# Allegro board isolated_v-i_dac.brd
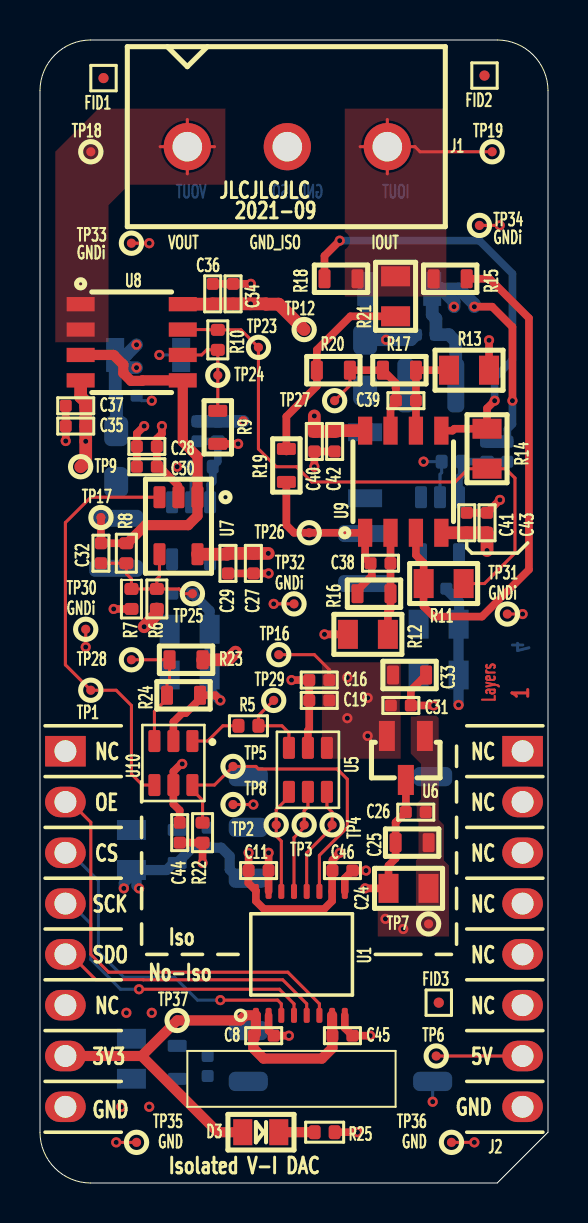
[diagram p0: board, top side]
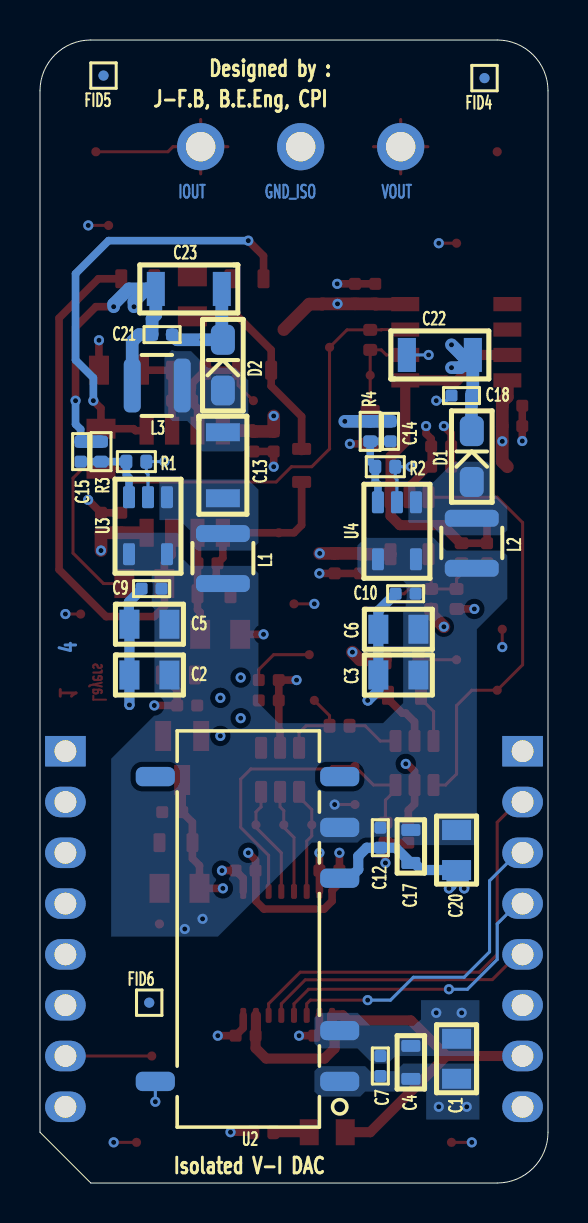
[diagram p1: board, bottom side, seen from below]

Outline 25.4 x 57.15 mm; copper layers: TOP, INNER1, INNER2, BOTTOM. Coordinates in mm from the lower left corner of the outline.
Outline path: 0,54.61 0,2.54 arc(0.74,0.74) 2.54,0 22.86,0 25.4,2.54 25.4,54.61 arc(24.66,56.41) 22.86,57.15 2.54,57.15 arc(0.74,56.41) 0,54.61

## Design rules (mm)
constraint set DEFAULT: min track width 0.152

## Placement (name value [footprint] x y rotation side)
C1  10uF  [0805_CAP]  4.57 7.11 270 bottom
C2  22uF  [0805_CAP]  20.83 25.4 180 bottom
C3  22uF  [0805_CAP]  8.38 25.4 180 bottom
C4  1uF  [0603_CAP_IPC]  6.86 6.86 270 bottom
C5  22uF  [0805_CAP]  20.83 27.94 180 bottom
C6  22uF  [0805_CAP]  8.38 27.69 180 bottom
C7  0.1uF  [0402_CAP_IPC]  8.38 6.35 270 bottom
C8  0.1uF  [0402_CAP_IPC]  11.68 7.37 180 top
C9  0.1uF  [0402_CAP_IPC]  20.32 29.72 180 bottom
C10  0.1uF  [0402_CAP_IPC]  7.62 29.46 180 bottom
C11  0.1uF  [0402_CAP_IPC]  11.43 15.62 180 top
C12  0.1uF  [0402_CAP_IPC]  8.38 16.76 90 bottom
C13  1uF  [1206_CAP]  16.26 37.34 270 bottom
C14  100pF  [0402_CAP_IPC]  7.87 37.08 90 bottom
C15  560pF  [0402_CAP_IPC]  23.37 36.07 90 bottom
C16  0.1uF  [0402_CAP_IPC]  13.46 25.15 0 top
C17  1uF  [0603_CAP_IPC]  6.86 16 90 bottom
C18  0.1uF  [0402_CAP_IPC]  4.83 39.37 180 bottom
C19  10nF  [0402_CAP_IPC]  13.46 24.13 0 top
C20  10uF  [0805_CAP]  4.57 15.75 90 bottom
C21  0.1uF  [0402_CAP_IPC]  18.8 42.42 0 bottom
C22  10uF  [1206_CAP]  6.86 41.4 180 bottom
C23  10uF  [1206_CAP]  16.51 44.7 0 bottom
C24  10uF  [0805_CAP]  17.53 14.73 0 top
C25  1uF  [0603_CAP_IPC]  17.78 17.02 0 top
C26  0.1uF  [0402_CAP_IPC]  18.29 18.54 0 top
C27  0.1uF  [0402_CAP_IPC]  10.67 30.48 90 top
C28  0.1uF  [0402_CAP_IPC]  5.84 36.83 180 top
C29  10nF  [0402_CAP_IPC]  9.4 30.48 90 top
C30  10nF  [0402_CAP_IPC]  5.84 35.81 180 top
C31  0.1uF  [0402_CAP_IPC]  18.54 23.88 180 top
C32  22pF  [0402_CAP_IPC]  3.05 30.99 90 top
C33  1uF  [0603_CAP_IPC]  19.3 25.4 180 top
C34  0.1uF  [0402_CAP_IPC]  9.65 44.96 270 top
C35  0.1uF  [0402_CAP_IPC]  2.29 37.85 180 top
C36  10nF  [0402_CAP_IPC]  8.64 44.96 270 top
C37  10nF  [0402_CAP_IPC]  2.29 38.86 180 top
C38  100pF  [0402_CAP_IPC]  17.53 30.99 180 top
C39  100pF  [0402_CAP_IPC]  18.8 39.12 180 top
C40  0.1uF  [0402_CAP_IPC]  13.72 36.58 90 top
C41  0.1uF  [0402_CAP_IPC]  22.35 32.51 90 top
C42  10nF  [0402_CAP_IPC]  14.73 36.58 90 top
C43  10nF  [0402_CAP_IPC]  21.34 32.51 90 top
C44  0.1uF  [0402_CAP_IPC]  6.99 17.02 90 top
C45  0.1uF  [0402_CAP_IPC]  15.62 7.37 180 top
C46  0.1uF  [0402_CAP_IPC]  15.62 15.62 180 top
D1  SD103AWS-TP  [SOD323]  3.81 35.05 90 bottom
D2  SD103AWS-TP  [SOD323]  16.26 39.62 90 bottom
D3  LED GREEN  [0603_LED]  11.94 2.54 180 top
FID1  Fiducial  [FIDUCIAL_CIR20MIL]  3.17 55.24 0 top
FID2  Fiducial  [FIDUCIAL_CIR20MIL]  22.23 55.37 0 top
FID3  Fiducial  [FIDUCIAL_CIR20MIL]  19.94 9.02 0 top
FID4  Fiducial  [FIDUCIAL_CIR20MIL]  3.17 55.24 180 bottom
FID5  Fiducial  [FIDUCIAL_CIR20MIL]  22.23 55.37 180 bottom
FID6  Fiducial  [FIDUCIAL_CIR20MIL]  19.94 9.02 180 bottom
J1  HEADER 3  [PHOENIX3]  7.37 51.82 0 top
J2  ClickBoard  [MIKROBUS-CLICKBOARD]  -1.27 1.27 0 top
L1  10uH  [IND_1008]  16.26 29.97 90 bottom
L2  10uH  [IND_1008]  3.81 30.73 90 bottom
L3  10uH  [IND_1008]  18.29 39.88 0 bottom
NOREF  -  []  18.54 4.32 0 top
NOREF#2  -  []  18.54 2.79 0 top
R1  1K96  [0402_RES_IPC]  21.08 36.07 180 bottom
R2  13K30  [0402_RES_IPC]  8.64 35.81 180 bottom
R3  29K4  [0402_RES_IPC]  22.35 36.07 90 bottom
R4  200K  [0402_RES_IPC]  8.89 37.08 90 bottom
R5  2K74  [0402_RES_IPC]  10.92 22.86 180 top
R6  5K90  [0402_RES_IPC]  5.84 28.7 90 top
R7  8K450  [0402_RES_IPC]  4.57 28.7 90 top
R8  16K20  [0402_RES_IPC]  4.32 30.99 90 top
R9  10K0  [0603_RES_IPC]  8.89 38.61 270 top
R10  5K90  [0402_RES_IPC]  8.89 41.66 90 top
R11  453K  [0805_RES_IPC]  21.08 29.97 180 top
R12  453K  [0805_RES_IPC]  15.49 27.43 0 top
R13  453K  [0805_RES_IPC]  22.35 40.64 180 top
R14  453K  [0805_RES_IPC]  22.35 35.81 90 top
R15  10K0  [0603_RES_IPC]  21.34 45.21 180 top
R16  10K0  [0603_RES_IPC]  17.53 29.46 180 top
R17  10K0  [0603_RES_IPC]  18.8 40.64 180 top
R18  10K0  [0603_RES_IPC]  14.22 45.21 0 top
R19  15R0  [0603_RES_IPC]  12.32 36.7 270 top
R20  15R0  [0603_RES_IPC]  15.49 40.64 180 top
R21  10R0  [0805_RES_IPC]  17.78 43.43 90 top
R22  10K0  [0402_RES_IPC]  8.13 17.02 90 top
R23  10K0  [0603_RES_IPC]  8.13 26.16 180 top
R24  10K0  [0603_RES_IPC]  6.35 24.38 0 top
R25  1K96  [0402_RES_IPC]  14.73 2.54 180 top
TP1  test_pad  [TEST_PAD_CIR_18MIL]  2.54 24.64 0 top
TP2  test_pad  [TEST_PAD_CIR_18MIL]  11.81 17.91 0 top
TP3  test_pad  [TEST_PAD_CIR_18MIL]  13.21 17.91 0 top
TP4  test_pad  [TEST_PAD_CIR_18MIL]  14.61 17.91 0 top
TP5  test_pad  [TEST_PAD_CIR_18MIL]  9.65 20.83 0 top
TP6  test_pad  [TEST_PAD_CIR_18MIL]  19.81 6.35 0 top
TP7  test_pad  [TEST_PAD_CIR_18MIL]  19.43 12.95 0 top
TP8  test_pad  [TEST_PAD_CIR_18MIL]  9.65 18.92 0 top
TP9  test_pad  [TEST_PAD_CIR_18MIL]  2.03 35.81 0 top
TP12  test_pad  [TEST_PAD_CIR_18MIL]  13.21 42.67 0 top
TP16  test_pad  [TEST_PAD_CIR_18MIL]  11.94 26.42 0 top
TP17  test_pad  [TEST_PAD_CIR_18MIL]  3.05 33.27 0 top
TP18  test_pad  [TEST_PAD_CIR_18MIL]  2.54 51.56 0 top
TP19  test_pad  [TEST_PAD_CIR_18MIL]  22.61 51.56 0 top
TP23  test_pad  [TEST_PAD_CIR_18MIL]  10.92 41.78 0 top
TP24  test_pad  [TEST_PAD_CIR_18MIL]  8.89 40.39 0 top
TP25  test_pad  [TEST_PAD_CIR_18MIL]  7.62 29.46 0 top
TP26  test_pad  [TEST_PAD_CIR_18MIL]  13.46 32.51 0 top
TP27  test_pad  [TEST_PAD_CIR_18MIL]  14.73 39.12 0 top
TP28  test_pad  [TEST_PAD_CIR_18MIL]  4.57 26.16 0 top
TP29  test_pad  [TEST_PAD_CIR_18MIL]  11.68 24.13 0 top
TP30  test_pad  [TEST_PAD_CIR_18MIL]  2.29 27.69 0 top
TP31  test_pad  [TEST_PAD_CIR_18MIL]  23.37 28.45 0 top
TP32  test_pad  [TEST_PAD_CIR_18MIL]  12.7 28.96 0 top
TP33  test_pad  [TEST_PAD_CIR_18MIL]  4.57 46.99 0 top
TP34  test_pad  [TEST_PAD_CIR_18MIL]  21.97 47.88 0 top
TP35  test_pad  [TEST_PAD_CIR_18MIL]  4.83 2.03 0 top
TP36  test_pad  [TEST_PAD_CIR_18MIL]  20.57 2.03 0 top
TP37  test_pad  [TEST_PAD_CIR_18MIL]  6.86 8.13 0 top
U1  ADUM7440ARQZ  [QSOP-16]  10.79 8.38 0 top
U2  DCPA10505P-U/700  [DCPA10505P]  10.41 5.08 90 bottom
U3  LM2611BMF  [SOT23-5]  19.05 34.29 0 bottom
U4  LMR64010XMFE/NOPB  [SOT23-5]  6.6 34.04 0 bottom
U5  DAC8311IDCKR  [SOT23-6]  12.45 19.56 0 top
U6  REF3040AIDBZT  [SOT23-3]  19.3 22.35 270 top
U7  TLV9301IDCKR  [SOT23-5]  7.87 34.29 180 top
U8  TLV9302IDR  [SOIC-8]  2.03 43.94 0 top
U9  TLV9302IDR  [SOIC-8]  16.26 32.51 90 top
U10  74LVC1G3157  [SOT23-6]  7.62 22.1 180 top

## Library data of the parts
C1-C46 = CAP-NP
D1 D2 = Diode Schottky
D3 = LED
FID1-FID6 = Fiducial
J1 = HEADER 3
J2 = ClickBoard-add-on_0
L1-L3 = Inductor
R1-R25 = Resistor
TP1-TP9 TP12 TP16-TP19 TP23-TP37 = test_pad
U1 = ADuM7440ARQZ
U2 = DCPA10505P
U3 = LM2611BMF
U4 = LMR64010XMFE
U5 = DAC8311
U6 = REF3040AIDBZT
U7 = TLV9301IDCKR
U8 U9 = TLV9302IDR
U10 = 74LVC1G3157

## Footprints (pads in the part's own frame, mm; a bottom-side part is the same pattern mirrored in y, then rotated)
0402_CAP_IPC
  rrect 0.6x0.6 smd: 1(0,0) 2(1,0)
0402_RES_IPC
  rrect 0.6x0.7 smd: 1(0,0) 2(1,0)
0603_CAP_IPC
  rrect 0.6x0.95 smd: 1(0,0) 2(1.651,0)
0603_LED
  rect 0.95x1.3 smd: 1(0,0) 2(1.8,0)
0603_RES_IPC
  rrect 0.6x0.95 smd: 1(0,0) 2(1.651,0)
0805_CAP
  rect 1x1.45 smd: 1(-0.1,0) 2(1.9,0)
0805_RES_IPC
  rect 1x1.45 smd: 1(-0.1,0) 2(1.9,0)
1206_CAP
  rect 0.9x1.7 smd: 1(-0.2,0) 2(3.1,0)
DCPA10505P
  rrect 0.965x1.956 smd: 1(0,0) 2(2.54,0) 3(10.16,0) 4(12.7,0) 5(15.24,0) 6(15.24,9.22) 7(0,9.22)
FIDUCIAL_CIR20MIL
  round 0.508 smd: 1(0,0)
IND_1008
  rrect 0.85x2.7 smd: 1(0,0) 2(2.5,0)
MIKROBUS-CLICKBOARD
  rect 2.032x1.524 hole 1.092: 1(2.54,20.32) 16(25.4,20.32)
  oval 2.032x1.524 hole 1.092: 2(2.54,17.78) 3(2.54,15.24) 4(2.54,12.7) 5(2.54,10.16) 6(2.54,7.62) 7(2.54,5.08) 8(2.54,2.54) 9(25.4,2.54) 10(25.4,5.08) 11(25.4,7.62) 12(25.4,10.16) 13(25.4,12.7) 14(25.4,15.24) 15(25.4,17.78)
PHOENIX3
  round 2.362 hole 1.473: 1(0,0) 2(5,0) 3(10,0)
QSOP-16
  rrect 0.3x0.75 smd: 1(0,0) 2(0.635,0) 3(1.27,0) 4(1.905,0) 5(2.54,0) 6(3.175,0) 7(3.81,0) 8(4.445,0) 9(4.445,6.198) 10(3.81,6.198) 11(3.175,6.198) 12(2.54,6.198) 13(1.905,6.198) 14(1.27,6.198) 15(0.635,6.198) 16(0,6.198)
SOD323
  rrect 1.5x1.2 smd: 1(0,0) 2(2.54,0)
SOIC-8
  rect 1.397x0.711 smd: 1(0,0) 2(0,-1.27) 3(0,-2.54) 4(0,-3.81) 5(5.105,-3.81) 6(5.105,-2.54) 7(5.105,-1.27) 8(5.105,0)
SOT23-3
  rect 1.5x0.8 smd: 1(0,-0.061) 2(0,-1.961) 3(2.2,-1.011)
SOT23-5
  rrect 0.6x1.1 smd: 1(0,0) 2(0.95,0) 3(1.9,0) 4(1.9,2.85) 5(0,2.85)
SOT23-6
  rrect 0.6x1.1 smd: 1(0,0) 2(0.95,0) 3(1.9,0) 4(1.9,2.2) 5(0.95,2.2) 6(0,2.2)
TEST_PAD_CIR_18MIL
  round 0.457 smd: 1(0,0)

## Nets
3V3: C8.2 C45.2 D3.2 J2.7 TP37.1(TEST) U1.1 U1.7
4V096ISO: C11.2 C16.2 C19.2 C31.2 C33.2 C44.2 C46.2 R6.1 R23.1 TP16.1(TEST) U1.10(VDD2B) U1.16 U5.4(VREF) U6.2(VOUT) U10.5(VCC)
5V0: C1.2 C4.2 C7.2 J2.10 TP6.1(TEST) U2.1
5VISO: C2.2 C3.2 C5.2 C6.2 C9.2 C10.2 C12.2 C17.2 C20.2 C24.2 C25.2 C26.2 L1.1 L2.1 TP7.1(TEST) TP8.1(TEST) U2.4 U3.4 U3.5(VIN) U4.4 U4.5(VIN) U6.1
20VCCISO: C14.2 C18.2 C22.2 C27.2 C29.2 C34.2 C36.2 C40.2 C42.2 D1.2(K) R4.2 TP12.1(TEST) U7.5 U8.8 U9.8
-20VCCISO: C15.2 C21.2 C23.2 C28.1 C30.1 C35.1 C37.1 C41.1 C43.1 L3.2 R3.2 TP9.1(TEST) U7.2(V-) U8.4(V-) U9.4(V-)
GND: C1.1 C4.1 C7.1 C8.1 C45.1 J2.8 J2.9 R25.1 TP35.1(TEST) TP36.1(TEST) U1.2 U1.8 U2.2 U2.7(SYNC)
GND_ISO: C2.1 C3.1 C5.1 C6.1 C9.1 C10.1 C11.1 C12.1 C16.1 C17.1 C18.1 C19.1 C20.1 C21.1 C22.1 C23.1 C24.1 C25.1 C26.1 C27.1 C28.2 C29.1 C30.2 C31.1 C33.1 C34.1 C35.2 C36.1 C37.2 C40.1 C41.2 C42.1 C43.2 C44.1 C46.1 D2.2(K) J1.2 R1.2 R2.2 R7.1 R9.2 R12.1 R13.1 R22.1 R24.2 TP30.1(TEST) TP31.1(TEST) TP32.1(TEST) TP33.1(TEST) TP34.1(TEST) U1.9 U1.15 U2.3 U3.2 U4.2 U5.5 U6.3 U10.2
DAC_CSN: J2.3 U1.3
DAC_MOSI: J2.5 U1.5
IOUT: J1.3 R15.2 R18.2 R21.2 TP19.1(TEST)
OUT_EN: J2.2 U1.6
SCK: J2.4 U1.4
VOUT: J1.1 TP18.1(TEST) U8.1 U8.2
N02659: C32.1 R6.2 R7.2 R8.1 TP25.1(TEST) U7.4
N02929: C32.2 R8.2 TP17.1(TEST) U7.1 U8.3 U8.5
N03595: R10.2 R11.1 R14.1 TP23.1(TEST) U8.7
N03627: R9.1 R10.1 TP24.1(TEST) U8.6
N03989: R11.2 R15.1 U9.3
N04068: C38.2 R16.2 R19.2 TP26.1(TEST) U9.1
N04246: C38.1 R12.2 R16.1 U9.2
N08088: R14.2 R18.1 U9.5
N08142: C39.2 R17.2 R20.1 TP27.1(TEST) U9.7
N08158: C39.1 R13.2 R17.1 U9.6
N08933: R19.1 R20.2 R21.1
N30227: TP2.1(TEST) U1.14 U5.1
N30231: TP3.1(TEST) U1.13 U5.2
N30243: TP4.1(TEST) U1.12 U5.3
N36112: C13.2 L1.2 U3.1
N36135: C13.1 D2.1 L3.1
N37664: C15.1 R1.1 R3.1 U3.3
N40846: D1.1 L2.2 U4.1
N41384: C14.1 R2.1 R4.1 U4.3
N64354: R22.2 TP5.1(TEST) U1.11 U10.6
N118132: R5.2 U10.1
N118601: TP1.1(TEST) U7.3 U10.4
N119212: R23.2 R24.1 TP28.1(TEST) U10.3
N145790: D3.1(CATHODE) R25.2
N176344: R5.1 TP29.1(TEST) U5.6

Pads without a net: FID1 1; FID2 1; FID3 1; FID4 1; FID5 1; FID6 1; J2 1 6 11 12 13 14 15 16; U2 5 6

## Via types
v1: diameter 0.508, hole 0.254, TOP to BOTTOM, 68 vias

## Routing (per net, layer and track width the routed paths; a pad name or vN(x,y) marks a point on that pad's centre or on a via; arc(x,y) is an arc through that point)
3V3: length 24.7
  TOP w0.381: 14.61,7.38 C45.2 ; 10.67,7.35 C8.2
  TOP w0.508: U1.7 14.61,7.38 ; 5.08,6.35 8.89,2.54 D3.2 ; 5.08,6.35 J2.7 ; 5.08,6.35 TP37.1 10.01,8.13 10.26,8.38 U1.1 10.79,7.48 C8.2 ; C45.2 14.62,6.75 14.1,6.22 11.18,6.22 10.67,6.73 10.67,7.35
4V096ISO: length 55.7
  TOP w0.152: C16.2 14.46,25.64 14.48,25.65 13.72,26.42 TP16.1
  TOP w0.381: C44.2 6.99,18.64 6.67,18.95 U10.5 6.67,20.57 7.05,20.95 v1(7.11,20.95) ; v1(10.43,16.51) C11.2 10.41,15.6 10.41,15 10.79,14.62 U1.16 10.79,14.1 11.19,13.7 14.21,13.7 14.61,14.1 U1.10 14.61,15.6 C46.2 14.62,16.15 v1(14.99,16.51)
  TOP w0.635: v1(9.78,26.54) 9.4,26.16 R23.1 ; v1(5.21,27.81) 5.84,28.45 R6.1
  INNER2 w0.635: v1(15.37,23.24) 12.95,23.24 10.67,20.95 v1(7.11,20.95) ; v1(5.21,27.81) 6.6,27.81 10.16,24.26 v1(16.38,24.26) ; v1(9.78,26.54) 14.1,26.54 v1(15.37,25.27) ; v1(16.38,22.35) 15.57,22.35 10.43,17.21 v1(10.43,16.51)
5V0: length 7.4
  TOP w0.152: TP6.1 J2.10
  INNER2 w0.152: J2.10 24.13,7.29 ; J2.10 24.13,5.41 ; J2.10 22.94,6.35
  vias: v1(4.06,3.81) v1(5.46,3.81)
5VISO: length 1
  TOP w0.152: TP8.1 v1(10.67,18.92)
  vias: v1(17.27,13.21) v1(18.16,12.7)
20VCCISO: length 55.9
  TOP w0.635: U9.8 14.77,37.62 C42.2 C40.2 v1(13.72,38.35) ; TP12.1 11.94,43.94 11.3,43.94 11.29,43.96 v1(10.52,43.96) C34.2 C36.2 8.62,43.94 U8.8 ; v1(11.41,31.48) C27.2 C29.2 9.36,31.44 U7.5
  INNER2 w0.635: v1(10.16,38.08) 10.16,38.99 9.14,40.01 ; v1(4.83,40.77) 4.32,40.26 4.32,36.32 9.14,31.5 10.7,31.5 10.72,31.48 v1(11.41,31.48) ; v1(4.83,40.77) v1(4.83,41.91) 6.87,43.96 v1(10.52,43.96) ; v1(4.83,40.77) 5.59,40.01 9.14,40.01 ; 9.14,40.01 12.06,40.01 v1(13.72,38.35)
  BOTTOM w0.635: C22.2 4.32,41.4 v1(4.83,41.91) ; C22.2 3.76,39.44 C18.2 3.83,37.61 D1.2 ; C22.2 4.39,40.77 v1(4.83,40.77) ; C14.2 R4.2 v1(10.16,38.08)
-20VCCISO: length 91.8
  TOP w0.381: U7.2 6.92,34.86 5.97,35.81 C30.1 C28.1 5.84,37.21 6.1,37.47 v1(6.1,37.85) ; v1(21.72,43.81) 22.61,43.81 23.62,42.8 v1(23.62,39.12)
  TOP w0.635: v1(22.35,31.62) C41.1 C43.1 U9.4 ; TP9.1 2.29,36.07 v1(2.29,37.08) C35.1 C37.1 2.29,39.06 2.03,39.31 U8.4
  INNER2 w0.635: 19.22,35.09 13.85,29.72 6.22,29.72 2.29,33.66 v1(2.29,37.08) ; 19.22,35.09 20.7,36.57 v1(20.7,43.81) v1(21.72,43.81) 21.72,42.45 21.73,42.44 21.73,32.25 v1(22.35,31.62) ; 19.22,35.09 8.85,35.09 v1(6.1,37.85)
  BOTTOM w0.381: C15.2 23.37,37.69 23.62,37.94 v1(23.62,39.12)
  BOTTOM w0.635: 20.07,44.7 20.95,44.7 21.72,43.94 v1(21.72,43.81) ; 20.07,44.7 20.7,44.07 v1(20.7,43.81) ; 20.07,44.7 C23.2 19.61,43.41 19.8,43.22 C21.2 20.45,42.42 20.79,42.08 L3.2 ; C15.2 R3.2
GND: length 14.4
  TOP w0.152: TP36.1 v1(21.72,2.03) ; TP35.1 v1(3.81,2.03)
  TOP w0.381: U1.8 15.24,7.75 C45.1 v1(16.51,7.37) ; v1(12.45,7.37) C8.1 11.43,7.62 U1.2 ; R25.1 v1(15.88,2.54)
  INNER1 w0.152: 24.13,2.87 J2.9 ; J2.9 22.94,3.81 ; J2.9 24.13,4.75 ; J2.8 2.46,3.81 ; J2.8 1.27,2.87 ; J2.8 1.27,4.75
  BOTTOM w0.152: U2.7 v1(19.63,4.06)
  vias: v1(4.32,8.51) v1(5.59,8.51)
GND_ISO: length 89.8
  TOP w0.152: TP31.1 v1(24.13,28.45) ; TP33.1 v1(5.46,46.99) ; TP30.1 v1(2.29,26.8) ; TP34.1 v1(22.99,47.88) ; TP32.1 v1(11.68,28.96)
  TOP w0.381: U5.5 13.4,22.63 13.46,22.69 C19.1 C16.1 v1(12.57,25.15) ; v1(10.54,44.96) C34.1 C36.1 ; U10.2 6.67,23.05 7.11,23.5 7.29,23.5 8,24.21 R24.2 8.76,24.38 v1(9.02,24.13) ; v1(11.43,30.48) C27.1 C29.1 ; v1(8.13,16) R22.1 C44.1 ; C30.2 C28.2 4.84,37.48 v1(5.21,37.85) ; v1(1.29,37.1) C35.2 C37.2 ; v1(19.68,23.88) C31.1 18.54,24.64 C33.1 ; v1(23,34.16) C41.2 C43.2 ; v1(16.26,14.73) C24.1 17.43,15.87 17.78,16.23 C25.1 17.78,18.03 C26.1 18.29,18.55 U6.3 ; R9.2 v1(9.91,36.96) ; U1.15 C11.1 v1(11.43,16.51) ; v1(13.72,35.81) C40.1 C42.1 ; v1(16.3,15.62) C46.1 15.24,15.24 U1.9 ; R13.1 v1(22.45,42.14) ; R12.1 v1(14.22,27.43) ; R7.1 v1(3.68,28.7)
  INNER1 w0.152: 12.37,50.46 J1.2 ; J1.2 12.37,53.18 ; J1.2 13.73,51.82 ; J1.2 11.01,51.82
  INNER2 w0.152: J1.2 13.73,51.82 ; J1.2 12.37,50.46 ; J1.2 12.37,53.18 ; J1.2 11.01,51.82
  BOTTOM w0.152: v1(6.86,35.81) R2.2 7.64,35.26 7.55,35.18 U4.2 ; U3.2 20,35.43 20.08,35.51 R1.2 v1(19.18,36.07) ; v1(5.59,39.12) 5.08,39.12 C18.1 ; C22.1 v1(5.97,41.4)
  BOTTOM w0.508: U2.3 9.92,15.24 9.49,15.67 9.49,16.34 9.06,16.76 C12.1 7.62,16.76 C17.1 6.68,16 6.33,15.65 C20.1 ; v1(4.19,14.73) 4.19,15 4.57,15.38 C20.1 ; C20.1 4.83,15.39 4.83,14.86 v1(4.95,14.73) ; v1(20.93,23.9) C2.1 C5.1 20.95,27.97 20.95,29.05 20.32,29.68 C9.1 ; C10.1 8.48,28.6 C6.1 C3.1 8.48,24.64 8.99,24.13 v1(9.02,24.13)
  BOTTOM w0.635: C23.1 16.31,42.22 D2.2 v1(17.3,42.16) 18.54,42.16 C21.1
DAC_CSN: length 16.6
  TOP w0.152: U1.3 12.06,8.96 11.88,9.14 v1(9.02,9.14)
  BOTTOM w0.152: J2.3 1.52,16.51 2.92,15.11 2.92,11.56 4.19,10.29 6.73,10.29 7.87,9.14 v1(9.02,9.14)
DAC_MOSI: length 13.7
  TOP w0.152: J2.5 1.52,11.43 2.78,10.17 5.15,10.17 5.16,10.16 12.14,10.16 13.34,8.96 U1.5
IOUT: length 9.4
  TOP w0.152: 17.37,50.46 J1.3 ; J1.3 17.37,53.18 ; J1.3 18.75,51.82 19,51.56 TP19.1 ; J1.3 16.01,51.82
OUT_EN: length 21.3
  TOP w0.152: J2.2 1.52,19.05 2.54,18.03 2.54,11.43 3.43,10.54 12.39,10.54 13.97,8.96 U1.6
SCK: length 15.1
  TOP w0.152: v1(4.95,9.69) 11.97,9.69 12.7,8.96 U1.4
  BOTTOM w0.152: v1(4.95,9.69) 4.03,9.69 2.54,11.18 2.54,12.95 1.52,13.97 J2.4
VOUT: length 5.4
  TOP w0.152: J1.1 7.37,53.18 ; J1.1 7.37,50.46 ; J1.1 6.01,51.82 ; J1.1 8.73,51.82
N02659: length 7.6
  TOP w0.152: R6.2 5.84,30.21 5.97,30.34 U7.4 ; R6.2 R7.2 4.57,30.21 4.32,30.46 R8.1 C32.1 ; R6.2 6.95,29.7 7.19,29.46 TP25.1
N02929: length 19.7
  TOP w0.381: TP17.1 C32.2 R8.2
  TOP w0.508: U8.3 3.68,41.4 4.17,40.92 4.17,40.49 4.55,40.11 5.1,40.11 5.13,40.13 U8.5 7.14,37.06 7.87,36.32 U7.1 7.87,33.36 7.41,32.89 5.27,32.89 4.37,31.99 R8.2
N03595: length 30.2
  TOP w0.152: R11.1 22.23,29.97 23.75,31.5 23.75,35.25 23.28,35.71 R14.1 21.42,35.71 20.76,35.05 13.59,35.05 12.83,35.81 11.81,35.81 10.92,36.7 TP23.1 10.05,42.66 R10.2 8.34,42.66 8.32,42.67 U8.7
N03627: length 4.9
  TOP w0.152: R9.1 TP24.1 R10.1 8.34,41.66 8.08,41.4 U8.6
N03989: length 26.8
  TOP w0.381: R15.1 22.48,45.21 24.45,43.24 24.45,30.67 22.1,28.32 19.68,28.32 19.18,28.83 19.18,29.97 R11.2 19.18,31.01 18.8,31.4 U9.3
N04068: length 9.7
  TOP w0.381: R19.2 12.32,32.89 12.7,32.51 TP26.1 U9.1 16.26,31.26 C38.2 16.59,30.93 16.59,30.35 15.88,29.64 R16.2
N04246: length 5.1
  TOP w0.381: U9.2 C38.1 R16.1 17.53,28.67 17.39,28.54 R12.2
N08088: length 22.1
  TOP w0.381: U9.5 20.62,37.62 20.72,37.71 R14.2 22.35,38.73 v1(22.73,39.12) ; R18.1 14.22,46.35 v1(14.99,47.12)
  BOTTOM w0.381: v1(14.99,47.12) 21.97,47.12 23.62,45.47 23.62,41.15 22.73,40.26 v1(22.73,39.12)
N08142: length 6.9
  TOP w0.152: TP27.1 15.49,39.88 R20.1
  TOP w0.381: R20.1 R17.2 17.78,40.01 17.78,39.75 17.8,39.73 C39.2 17.8,39.01 17.53,38.73 U9.7
N08158: length 4.7
  TOP w0.381: R13.2 R17.1 C39.1 U9.6
N08933: length 10.3
  TOP w0.381: R21.1 15.52,43.33 13.84,41.66 R20.2 13.84,39.85 12.32,38.32 R19.1 12.32,36.58
N30227: length 5.3
  TOP w0.152: U5.1 12.45,19.31 11.81,18.67 TP2.1 11.81,17.35 12.06,17.09 U1.14
N30231: length 5.3
  TOP w0.152: U5.2 13.4,18.8 13.21,18.62 TP3.1 13.21,17.78 12.7,17.27 U1.13
N30243: length 5.6
  TOP w0.152: U5.3 14.35,18.8 14.61,18.55 TP4.1 14.61,17.78 13.34,16.51 U1.12
N37664: length 4.1
  BOTTOM w0.381: U3.3 20.95,35.27 21.08,35.4 R1.1 R3.1 C15.1
N41384: length 4.2
  BOTTOM w0.381: U4.3 8.5,34.92 8.64,35.06 R2.1 8.89,36.07 R4.1 C14.1
N64354: length 16.7
  TOP w0.152: U1.11 13.97,16.38 15.37,17.78 15.37,20.19 14.86,20.7 10.92,20.7 10.79,20.83 TP5.1 8.72,19.9 U10.6 7.62,19.65 8.13,19.14 R22.2
N118132: length 2.6
  TOP w0.152: R5.2 9.14,22.86 8.38,22.1 U10.1
N118601: length 21.3
  TOP w0.152: U7.3 2.54,34.29 1.27,33.02 1.27,25.91 TP1.1 3.81,24.64 4.57,23.88 4.57,20.45 5.12,19.9 U10.4
N119212: length 6.3
  TOP w0.152: TP28.1 R23.2 6.48,25.19 6.35,25.06 R24.1 6.35,24.21 5.72,23.58 U10.3
N145790: length 1.8
  TOP w0.508: D3.1 R25.2
N176344: length 4
  TOP w0.152: TP29.1 10.92,23.37 R5.1 12.1,22.86 12.45,22.51 U5.6

## Copper pours and planes (outline as drawn; the poured copper is in the pictures)
4V096ISO on TOP: 14.1,26.04 18.03,26.04 18.03,21.21 14.1,21.21
5V0 on BOTTOM: 3.43,5.97 3.43,3.17 6.1,3.17 6.1,4.57 9.14,4.57 9.4,4.32 11.43,4.32 11.68,4.57 11.68,5.59 11.43,5.84 9.14,5.84 8.89,5.59 7.62,5.59 7.24,5.97
5V0 on INNER2: 2.67,10.67 22.73,10.67 22.73,7.49 24.64,7.49 24.64,4.95 22.73,4.95 22.73,0.89 22.61,0.76 2.67,0.76
5VISO on TOP: 19.81,23.37 19.94,23.24 19.94,18.16 20.19,17.91 20.19,16.13 20.45,15.88 20.45,12.32 16.89,12.32 16.89,13.72 18.8,13.72 18.8,16.13 18.92,16.26 18.92,18.03 18.8,18.16 18.8,18.92 19.05,19.18 19.05,20.95 18.54,21.46 18.54,23.37
5VISO on BOTTOM: 2.03,29.21 2.03,31.37 2.29,31.62 5.08,31.62 5.71,32.26 9.14,32.26 9.53,31.88 9.53,30.61 9.14,30.23 7.37,30.23 7.11,29.97 7.11,28.83 7.24,28.7 7.24,24 8.26,22.99 13.46,22.99 14.48,24 14.48,30.48 14.86,30.86 17.91,30.86 18.29,31.24 18.29,32.26 18.54,32.51 21.72,32.51 21.72,30.48 19.81,30.48 19.81,28.83 19.68,28.7 19.68,23.37 21.84,21.21 21.84,12.32 16.51,12.32 11.81,17.02 9.4,17.02 9.14,17.27 7.62,17.27 7.24,16.89 3.56,16.89 3.56,27.69
GND on BOTTOM: 3.43,9.14 3.43,6.35 7.62,6.35 8,5.97 8.76,5.97 9.53,6.73 11.43,6.73 11.68,6.99 11.68,8.26 11.43,8.51 9.53,8.51 8.89,7.87 6.69,7.87 6.35,8.18 6.35,9.14
GND on INNER1: 2.67,10.67 22.73,10.67 22.73,4.95 24.64,4.95 24.64,2.79 22.61,0.76 2.29,0.76 2.28,0.76 1.28,1.11 0.76,2.03 0.76,2.03 0.76,2.29 0.76,4.95 2.67,4.95
GND_ISO on INNER1, INNER2: 22.86,56.39 22.92,56.39 22.99,56.39 24.11,55.95 24.64,54.86 24.64,54.61 24.64,27.3 23.37,27.3 23.37,24 21.84,24 21.84,12.32 3.56,12.32 3.56,24 0.76,24 0.76,54.86 0.76,54.87 1.38,55.94 2.53,56.39 2.54,56.39
IOUT on TOP: 20.32,53.72 15.24,53.72 15.24,44.32 20.32,44.32
VOUT on TOP: 2.92,53.72 9.27,53.72 9.27,49.91 4.45,49.91 3.43,48.9 3.43,42.04 0.76,42.04 0.76,51.56
N36112 on BOTTOM: 14.99,35.18 19.43,35.18 19.43,33.15 18.41,33.15 17.91,32.64 17.91,32 17.53,31.62 14.86,31.62 14.48,32 14.48,34.67
N36135 on BOTTOM: 17.91,41.66 18.8,41.66 19.18,41.27 19.18,38.48 18.8,38.1 18.03,38.1 17.53,37.59 17.53,36.83 17.27,36.58 15.24,36.58 14.99,36.83 14.99,40.13 15.62,40.77 17.02,40.77
N40846 on BOTTOM: 4.7,36.07 3.05,36.07 2.79,35.81 2.79,34.54 2.03,33.78 2.03,32.64 2.29,32.38 5.33,32.38 5.97,33.02 6.99,33.02 6.99,35.05 5.71,35.05

## Text on the board
BOTTOM: VOUT | GND_ISO | IOUT | 4
Ref Des/Silkscreen Bottom: Designed by : | Isolated V-I DAC | J-F.B, B.E.Eng, CPI
TOP: Layers | 1
Ref Des/Silkscreen Top: GNDi | GND | VOUT | GND_ISO | IOUT | No-Iso | Iso | Isolated V-I DAC | JLCJLCJLC | 2021-09
INNER1: 2
INNER2: 3
XSECTION_CHART: *  SURFACE - AIR 0 MIL(+0/-0) | L1 TOP CONDUCTOR - COPPER 1.4 MIL(+0/-0) | *  DIELECTRIC - FR-4 8 MIL(+0/-0) | L2 INNER1 PLANE - COPPER 0.7 MIL(+0/-0) | *  DIELECTRIC - FR-4 42 MIL(+0/-0) | L3 INNER2 PLANE - COPPER 0.7 MIL(+0/-0) | L4 BOTTOM CONDUCTOR - COPPER 1.4 MIL(+0/-0) | DESIGN CROSS SECTION CHART | ___________________________ | TOTAL THICKNESS 62.2 MIL | 1-4 | FIGURE | FINISHED_SIZE | 10.0 | 43.0 | 58.0 | DRILL CHART: TOP to BOTTOM | ALL UNITS ARE IN MILS | TOLERANCE_DRILL | +3.0/-3.0 | PLATED | QTY | 68 | 16 | 3 | 87 | TOTAL HOLES:
